# EAGLE board remote tester (EAGLE 6.5.0)
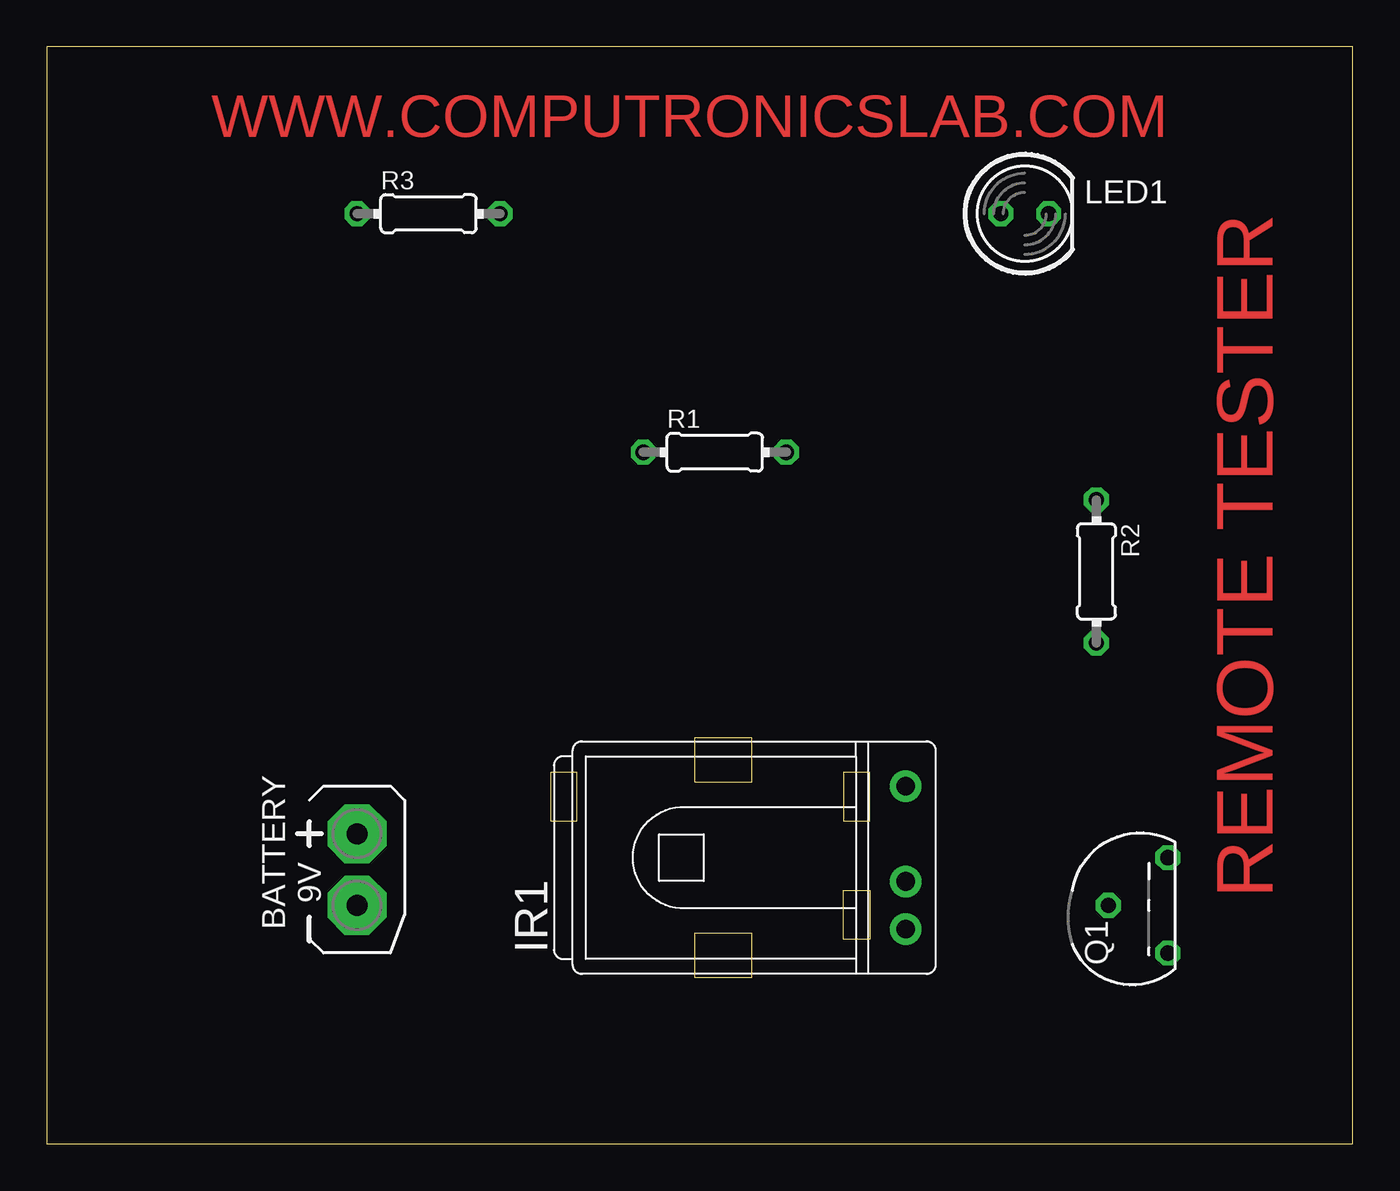
[diagram p0: board, top side]
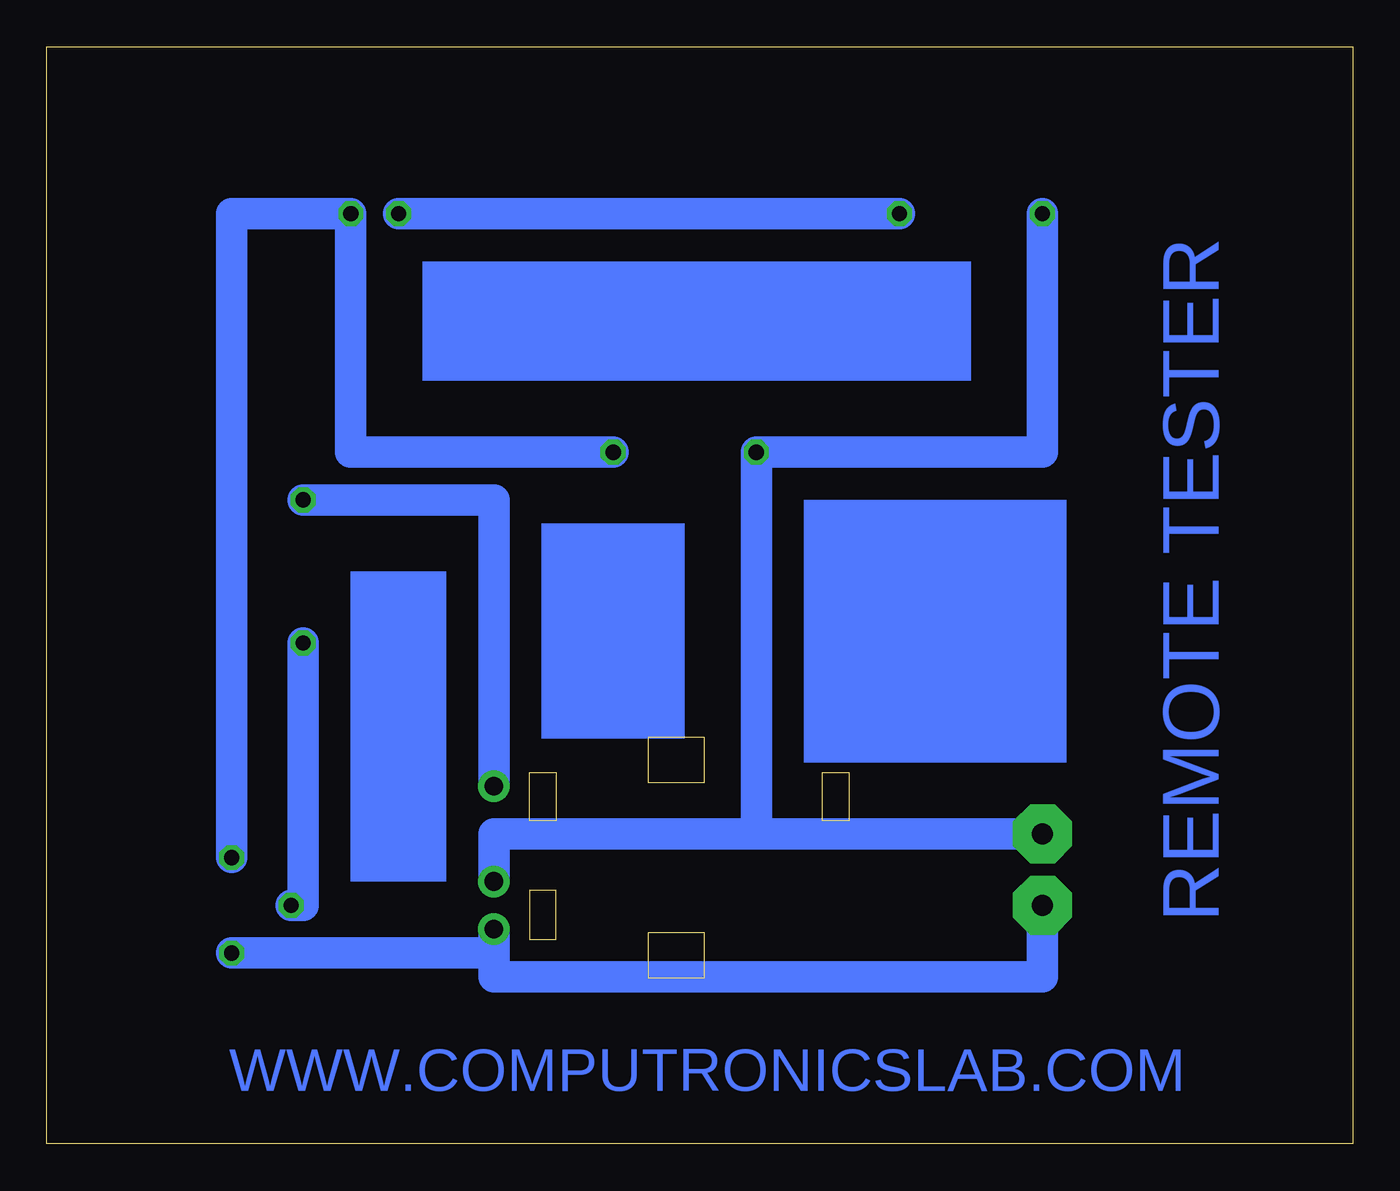
[diagram p1: board, bottom side, seen from below]

Size 69.52 x 58.41 mm. Coordinates in mm from the lower left corner, seen from the top.
Outline: 0,0 69.52,0 69.52,58.41 0,58.41 0,0
Copper layers (1*16): Top 0.035mm / dielectric 1.5mm / Bottom 0.035mm
Design rules "default": minimum track width 10mil, minimum drill 24mil, track to track 8mil, track to pad 8mil, pad to pad 8mil, via to via 8mil, smd to smd 8mil, copper to edge 40mil, drill to drill 8mil, minimum pad ring 10mil, minimum via ring 8mil, stop-mask expansion 4mil, vias tented up to drill 0mil, thermal gap 10mil

## Footprints (pad centres in the part's own frame; a part is rotated, then mirrored left to right if it is on the bottom)
AB9V = drill 1.118 pad 3.15 octagon: + 0,2.54; - 0,-1.27
TSOP17_TB1 = drill 1 pad 1.676: GND 0,-3.81; VO 0,3.81; VS 0,-1.27
LED5MM = drill 0.813 octagon: A -1.27,0; K 1.27,0
TO92 = drill 0.813 octagon: 1 2.54,-1.27; 2 0,1.905; 3 -2.54,-1.27
0204/7 = drill 0.813 octagon: 1 -3.81,0; 2 3.81,0

## Placement (x,y rotation side)
BATTERY  9V  [AB9V]  16.51,13.97 0 top
IR1  TSOP1738  [TSOP17_TB1]  45.72,15.24 0 top
LED1  5mm  [LED5MM]  52.07,49.53 0 top
Q1  BC557  [TO92]  58.42,12.7 90 top
R1  10k  [0204/7]  35.56,36.83 0 top
R2  1k  [0204/7]  55.88,30.48 270 top
R3  220E  [0204/7]  20.32,49.53 0 top

## Library data of the parts
BATTERY = battery
IR1 = telefunken; OC_FARNELL: unknown; OC_NEWARK: unknown
LED1 = led
Q1 = transistor-pnp
R1-R3 = eagle-ltspice; SPICEMODEL: NONE; SPICEPREFIX: R

## Nets
N$1: BATTERY.+ IR1.VS R1.1 R3.1
N$2: BATTERY.- IR1.GND Q1.3
N$3: LED1.A R3.2
N$4: Q1.2 R2.2
N$5: LED1.K Q1.1 R1.2
N$6: IR1.VO R2.1

## Tracks (layer width: path | path; a pad name or v marks a point on that pad's centre or on a via)
N$1
  Bottom 1.676: R3.1 16.51,36.83 R1.1 31.75,16.51 | BATTERY.+ 31.75,16.51 | IR1.VS 45.72,16.51 31.75,16.51
N$2
  Bottom 0.254: IR1.GND 45.72,10.16
  Bottom 1.676: 45.72,10.16 Q1.3 | BATTERY.- 16.51,8.89 45.72,8.89 IR1.GND
N$3
  Bottom 1.676: LED1.A R3.2
N$4
  Bottom 1.676: R2.2 55.88,12.7 Q1.2
N$5
  Bottom 1.676: LED1.K 53.34,36.83 R1.2 | Q1.1 59.69,49.53 LED1.K | 53.34,48.26 LED1.K
N$6
  Bottom 1.676: IR1.VO 45.72,34.29 R2.1
(copper drawn outside any net)
  shapes: Bottom area x4

## Text on the board
Top: WWW.COMPUTRONICSLAB.COM | REMOTE TESTER
Bottom: REMOTE TESTER | WWW.COMPUTRONICSLAB.COM